# Altium PCB layout.PcbDoc
Units mil, origin at the board's own origin, x right, y up, seen from the top; angles counter-clockwise.
Board outline 6000 x 4000 mil, 4 copper layers (Top Layer, GND, VCC, Bottom Layer), stack 23.756 mil thick; 27 components, 18 nets, 136 pads, 0 vias.
Unrouted connection lines stored in the file: 79.
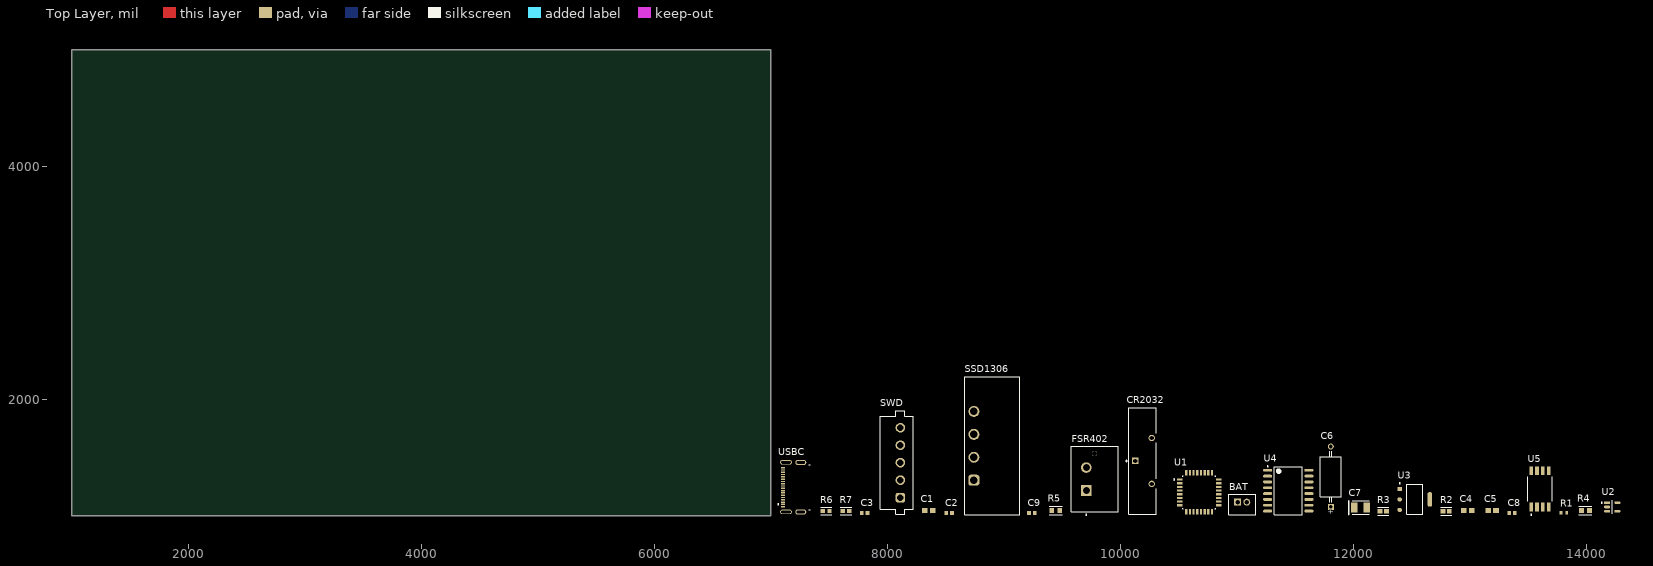
[diagram p0: Top Layer view]
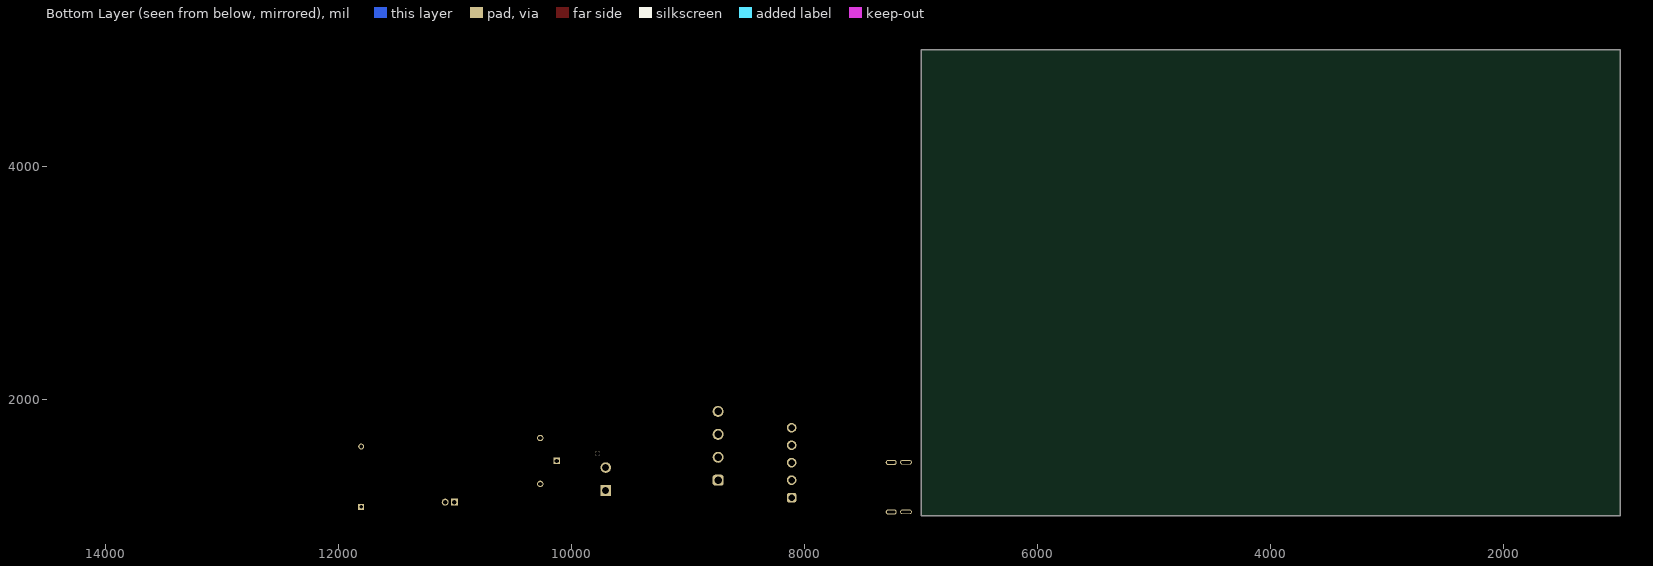
[diagram p1: Bottom Layer view, seen from below]
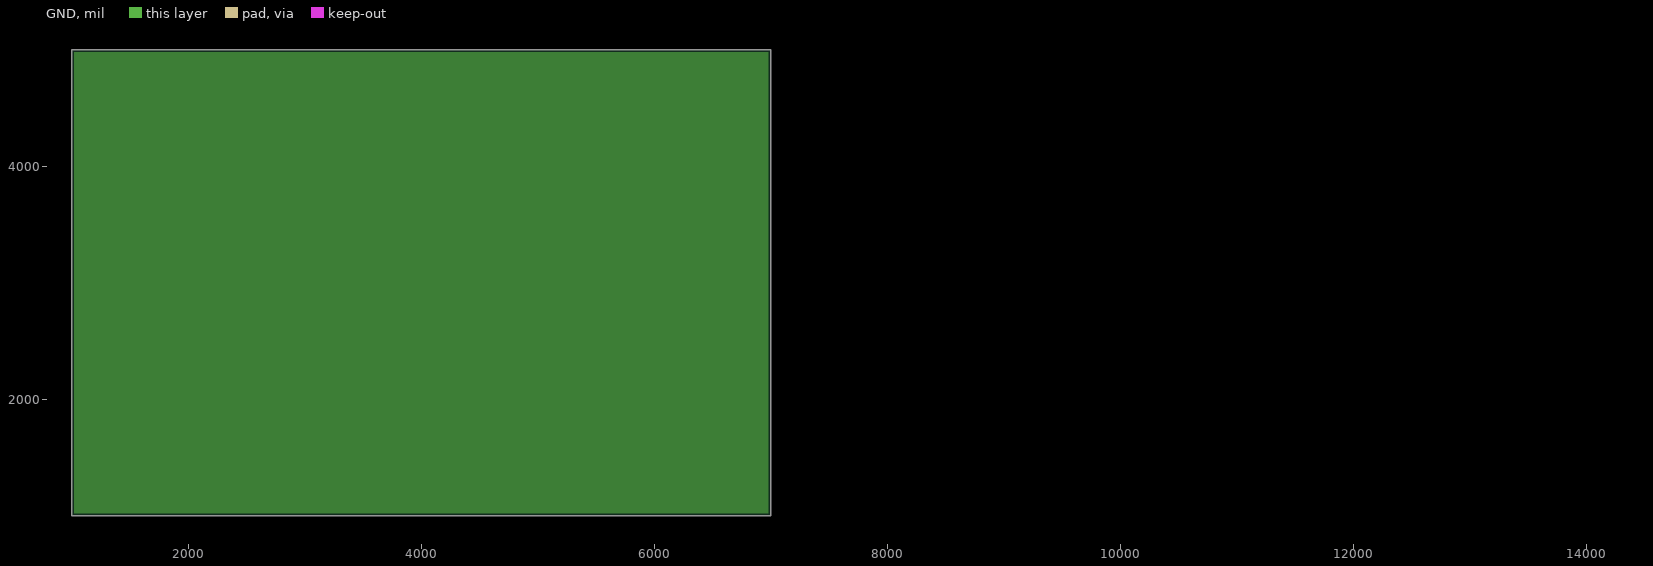
[diagram p2: GND, clearances drawn from the general rule]
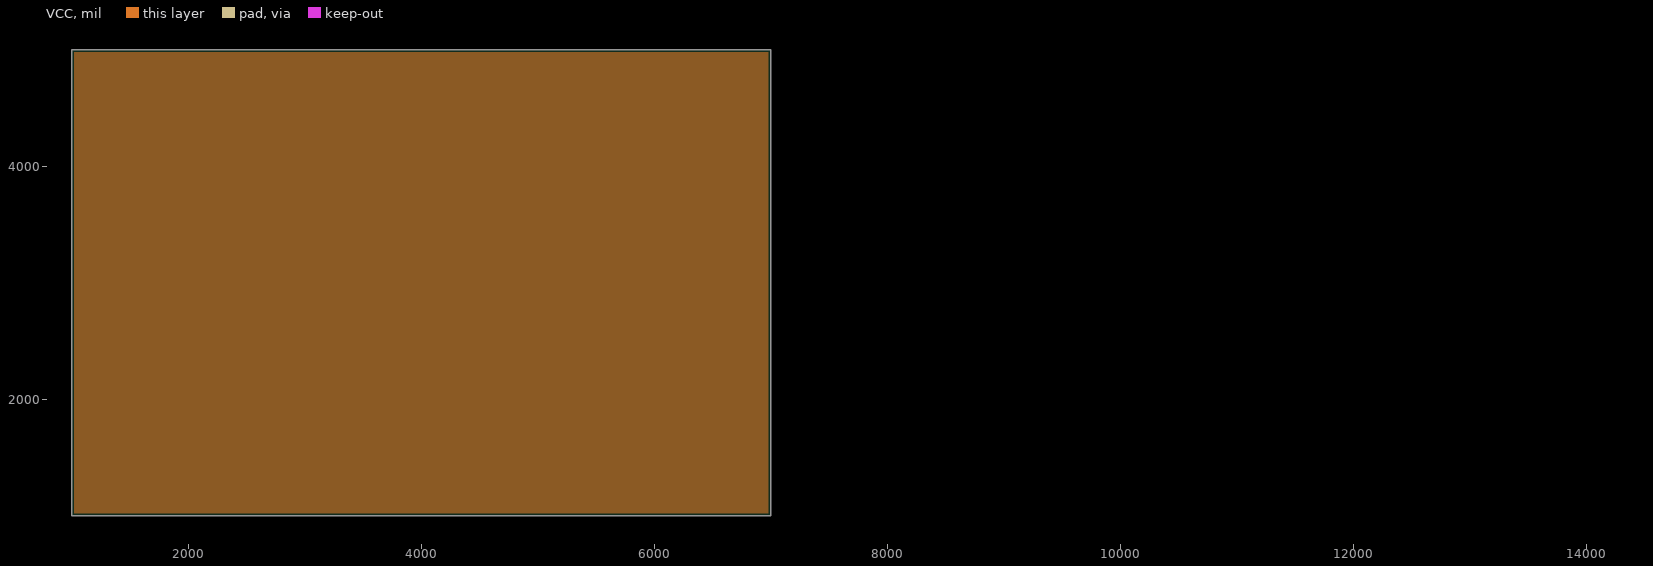
[diagram p3: VCC, clearances drawn from the general rule]

## Layer stack, top to bottom
Top Solder: solder mask 0.4, Solder Resist, Dk 3.5
Top Layer: signal copper 1.4
Dielectric 2: prepreg 2.8, PP-006, Dk 4.1
GND: plane copper 1.378
Dielectric 1: dielectric 12.6, FR-4, Dk 4.8
VCC: plane copper 1.378
Dielectric 3: prepreg 2.8, PP-006, Dk 4.1
Bottom Layer: signal copper 1.4
Bottom Solder: solder mask 0.4, Solder Resist, Dk 3.5

## Board outline
1000,1000 7000,1000 7000,5000 1000,5000

## Design rules (kind name [scope] priority, off if disabled: settings)
Clearance [All] p1: gap=10 ignorepadtopadclearanceinfootprint=FALSE
PlaneClearance [All] p1: clearance=20
PlaneConnect [All] p1: planeconnectstyle=Relief reliefexpansion=20 reliefentries=4 reliefconductorwidth=10 reliefairgap=10
PolygonConnect [All] p1: connectstyle=Relief reliefconductorwidth=10 reliefentries=4 polygonreliefangle="90 Angle" airgapwidth=10
RoutingVias [All] p1: holewidth=28 width=50 viastyle="Through Hole" minholewidth=28 minwidth=50 maxholewidth=28 maxwidth=50
SolderMaskExpansion [All] p1: expansion=0 istentingtop=FALSE
SupplyNets "Schematic Supply Nets_1" [InNet('BAT_MINUS')] p1: voltage=0.000
SupplyNets "Schematic Supply Nets" [InNet('VCC')] p2: voltage=0.000
Width [All] p1: maxlimit=10 minlimit=10 preferedwidth=10
28 further rules are at their usual default settings.

## Components (designator, comment, footprint, x,y, rotation, side; value= is the part's Value field where it differs from the comment)
BAT "B2B-PH-K-S(LF)(SN)" JST-B2B-PH-K-S_V 11045,1095 r0 top
C1 "4.7uF" CAPC1608X90X35ML15T15 8355,1045 r0 top
C2 "100nF" CAPC1608X87X35LL15T15 8530,1025 r0 top
C3 "100nF" CAPC1608X87X35LL15T15 7805,1025 r0 top
C4 "4.7uF" CAPC1608X90X35ML15T15 12980,1045 r0 top
C5 "4.7uF" CAPC1608X90X35ML15T15 13190,1045 r0 top
C6 "10uF" KEMT-T322-2_V 11805,1335 r90 top
C7 "22uF" KEMT-T491-B_L 12060,1070 r0 top
C8 "100nF" CAPC1608X87X35LL15T15 13360,1025 r0 top
C9 "100nF" CAPC1608X87X35LL15T15 9240,1025 r0 top
CR2032 "Holder" FP-1775485-1-MFG 10190,1470 r90 top
FSR402 "" FP-B02B-WPJSS-1_LF_SN-MFG 9780,1315 r90 top
R1 "2kΩ" RESC1608X55X25LL10T15 13805,1025 r0 top
R2 "4.7kΩ" FP-RMCF0603-IPC_B 12795,1040 r0 top
R3 "4.7kΩ" FP-RMCF0603-IPC_B 12255,1040 r0 top
R4 "10kΩ" FP-AC0603-IPC_A 13990,1045 r0 top
R5 "10kΩ" FP-AC0603-IPC_A 9445,1045 r0 top
R6 "5.1kΩ" FP-MCR03-IPC_B 7475,1040 r0 top
R7 "5.1kΩ" FP-MCR03-IPC_B 7645,1040 r0 top
SSD1306 "691317710004" 691317710004 8900,1600 r90 top
SWD "691305330005" 691305330005 8080,1455 r90 top
U1 "STM32G031K8T6" FP-LQFP32-5V-MFG 10675,1200 r0 top
U2 "MCP73831T-2ACI/OT" FP-C04-091-OT-IPC_B 14220,1075 r0 top
U3 "AMS1117-3.3" FP-AMS1117-IPC_C 12525,1140 r0 top
U4 "DS3231SN#" W16#H2_L 11440,1215 r0 top
U5 "W25Q32FVSSIG" FP-SS-MFG 13600,1230 r90 top
USBC "CX90M-16P" FP-CX90M-16P-MFG 7225,1245 r90 top

## Footprints (in the part's own frame and the unit in brackets; to place one, negate y for a bottom-side part, rotate by r counter-clockwise, add the part's x,y. Pads: shape width x height; smd on the part's side, far side on the other; paste and mask are expansions set on the pad)
691305330005 [mm] "Vertical PCB Header with Plastic Latch, pitch 3.81mm, 05p"
  rrect50% 2.1x2.1 hole 1.4: 1(-7.62,-0.8)
  round 2.1 hole 1.4: 2(-3.81,-0.8) 3(0,-0.8) 4(3.81,-0.8) 5(7.62,-0.8)
  silkscreen extent -11.27,-3.6 11.27,3.6, body extent -11.27,-3.6 11.27,3.6, height 9.25
691317710004 [mm] "5.00mm - Closed Horizhontal PCB Header with Flanges - 04p"
  rrect50% 2.4x2.4 hole 1.6: 1(-7.5,4)
  round 2.4 hole 1.6: 2(-2.5,4) 3(2.5,4) 4(7.5,4)
  silkscreen extent -15,-6 15,6, body extent -15,-6 15,6, height 8.55
CAPC1608X87X35LL15T15 [mm] "Chip Capacitor, 2-Leads, Body 1.60x0.80mm, IPC High Density"
  rect 0.8x0.9 smd: 1(-0.625,0) 2(0.625,0)
  body extent -0.87,-0.48 0.87,0.48, height 0.87
CAPC1608X90X35ML15T15 [mm] "Chip Capacitor, 2-Leads, Body 1.60x0.81mm, IPC Low Density"
  rect 1.25x1.1 smd: 1(-0.85,0) 2(0.85,0)
  body extent -0.88,-0.48 0.87,0.48, height 0.9
FP-1775485-1-MFG [mm]
  rect 1.4x1.4 hole 0.9 paste-2539.97 mask+0: 1(0,1.6)
  round 1.4 hole 0.9 paste-2539.97 mask+0: 2(-5,-2) 2(5,-2)
  silkscreen extent -11.63,-3.03 11.63,3.62, body extent -11.73,-3.13 11.73,3.13, height 0.25
FP-AC0603-IPC_A [mil]
  rect 41.68x39.85 smd paste+0 mask+0: 1(-34.52,0) 2(34.52,0)
  silkscreen extent -55,-36 55,36, body extent -75,-40 75,40, height 10
FP-AMS1117-IPC_C [mm]
  rect 1.004x0.872 smd paste+0 mask+0: 1(-3.295,2.29)
  rrect100% 1.004x0.872 smd paste+0 mask+0: 2(-3.295,0) 3(-3.295,-2.29)
  rrect87% 1.004x3.182 smd paste+0 mask+0: 4(3.295,0)
  silkscreen extent -3.42,-3.25 1.75,3.62, body extent -3.9,-3.35 3.9,3.35, height 0.25
FP-B02B-WPJSS-1_LF_SN-MFG [mm]
  rect 2.3x2.3 hole 1.5 paste-2539.97 mask+0: 1(-2.5,1.85)
  round 2.3 hole 1.5 paste-2539.97 mask+0: 2(2.5,1.85)
  round 1.1 hole 1.1 unplated paste-2539.97 mask+0: ""(5.575,0.05)
  silkscreen extent -7.87,-5.1 7.1,5.1, body extent -7.2,-5.2 7.2,5.2, height 0.25
FP-C04-091-OT-IPC_B [mm]
  rect 1.338x0.578 smd paste+0 mask+0: 1(-1.116,0.95)
  rrect100% 1.338x0.578 smd paste+0 mask+0: 2(-1.116,0) 3(-1.116,-0.95) 4(1.116,-0.95) 5(1.116,0.95)
  silkscreen extent -2.41,-1.45 0.05,1.45
FP-CX90M-16P-MFG [mm]
  rect 0.3x0.9 smd paste+0 mask+0: 1(-4.25,3.025) 2(4.25,3.025) A1(-3.75,3.025) A4(-2.75,3.025) A5(-1.75,3.025) A6(-0.75,3.025) A7(0.75,3.025) A8(1.75,3.025) A9(2.75,3.025) A12(3.75,3.025) B1(3.25,3.025) B4(2.25,3.025) B5(1.25,3.025) B6(0.25,3.025) B7(-0.25,3.025) B8(-1.25,3.025) B9(-2.25,3.025) B12(-3.25,3.025)
  rrect100% 1x2.55 hole 2.05 slot 0.5 at 0 deg paste-2539.97 mask+0: 3(-5.4,2.405) 4(5.4,2.405)
  rrect100% 1.1x2.4 hole 1.8 slot 0.5 at 0 deg paste-2539.97 mask+0: 5(-5.4,-0.825) 6(5.4,-0.825)
  silkscreen extent -4.87,-2.9 4.87,4.2, body extent -6.05,-3.37 6.05,3.78, height 0.25
FP-LQFP32-5V-MFG [mm]
  rect 1.2x0.5 smd paste+0 mask+0: 1(-4.25,2.8) 2(-4.25,2) 3(-4.25,1.2) 4(-4.25,0.4) 5(-4.25,-0.4) 6(-4.25,-1.2) 7(-4.25,-2) 8(-4.25,-2.8) 17(4.25,-2.8) 18(4.25,-2) 19(4.25,-1.2) 20(4.25,-0.4) 21(4.25,0.4) 22(4.25,1.2) 23(4.25,2) 24(4.25,2.8)
  rect 0.5x1.2 smd paste+0 mask+0: 9(-2.8,-4.25) 10(-2,-4.25) 11(-1.2,-4.25) 12(-0.4,-4.25) 13(0.4,-4.25) 14(1.2,-4.25) 15(2,-4.25) 16(2.8,-4.25) 25(2.8,4.25) 26(2,4.25) 27(1.2,4.25) 28(0.4,4.25) 29(-0.4,4.25) 30(-1.2,4.25) 31(-2,4.25) 32(-2.8,4.25)
  silkscreen extent -5.57,-3.6 3.6,3.6, body extent -4.95,-4.95 4.95,4.95, height 0.25
FP-MCR03-IPC_B [mil]
  rect 37.72x35.91 smd paste+0 mask+0: 1(-28.62,0) 2(28.62,0)
  silkscreen extent -47,-34 47,34, body extent -57,-28 57,28, height 10
FP-RMCF0603-IPC_B [mil]
  rect 39.61x37.73 smd paste+0 mask+0: 1(-27.6,0) 2(27.6,0)
  silkscreen extent -47,-35 47,35, body extent -57,-29 57,29, height 10
FP-SS-MFG [mm]
  rect 1.9x0.8 smd paste-1000 mask+0: 1(-3.95,1.905) 2(-3.95,0.635) 3(-3.95,-0.635) 4(-3.95,-1.905) 5(3.95,-1.905) 6(3.95,-0.635) 7(3.95,0.635) 8(3.95,1.905)
  silkscreen extent -5.71,-2.69 2.69,2.69, body extent -5,-2.79 5,2.79, height 0.25
JST-B2B-PH-K-S_V [mm] "Connector, 2-Leads, Body 5.9x4.5mm, Pitch 2mm"
  rect 1.5x1.5 hole 1: 1(-1,0.55)
  round 1.5 hole 1: 2(1,0.55)
  silkscreen extent -2.95,-2.25 2.95,2.25, body extent -2.95,-2.25 2.95,2.25, height 6
KEMT-T322-2_V [mm] "THD, 2-Leads, Dia 4.57mm"
  rect 1.3x1.3 hole 0.8 paste-2539.97: 1(-6.57,0)
  round 1.3 hole 0.8 paste-2539.97: 2(6.57,0)
  silkscreen extent -5.52,-2.28 5.55,2.28, body extent -6.82,-2.29 6.83,2.28, height 4.57
KEMT-T491-B_L [mm] "Molded Capacitor, 2-Leads, Body 3.70x3.00mm, IPC High Density"
  rect 1.4x2.15 smd: 1(-1.375,0) 2(1.375,0)
  silkscreen extent -2.57,-1.5 1.85,1.5, body extent -2.07,-1.5 2.07,1.5, height 2.1
RESC1608X55X25LL10T15 [mm] "Chip Resistor, 2-Leads, Body 1.60x0.80mm, IPC High Density"
  rect 0.6x0.8 smd: 1(-0.65,0) 2(0.65,0)
  body extent -0.85,-0.45 0.85,0.45, height 0.55
W16#H2_L [mm] "SOIC, 16-Leads, Body 10.3x7.5mm, Pitch 1.27mm, IPC High Density"
  oval 2x0.6 smd: 1(-4.5,4.445) 2(-4.5,3.175) 3(-4.5,1.905) 4(-4.5,0.635) 5(-4.5,-0.635) 6(-4.5,-1.905) 7(-4.5,-3.175) 8(-4.5,-4.445) 9(4.5,-4.445) 10(4.5,-3.175) 11(4.5,-1.905) 12(4.5,-0.635) 13(4.5,0.635) 14(4.5,1.905) 15(4.5,3.175) 16(4.5,4.445)
  silkscreen extent -4.62,-5.25 3.1,5.42, body extent -3.8,-5.25 3.8,5.25, height 2.65

## Part data
BAT: library part CMP-2000-05162-1, "Male Header, Pitch 2 mm, 1 x 2 Position, Height 6 mm, Tail Length 3.4 mm, -25 to 85 degC, RoHS, Bulk", Manufacturer=JST, Datasheet URL=http://datasheet.octopart.com/B2B-PH-K-S%28LF%29%28SN%29-JST-datasheet-8324864.pdf, Datasheet Version=Nov-08, Manufacturer URL=http://www.jst.com/home2.html, No of Positions=2, Pitch=2mm, Style/Orientation=StraightHeader/Plug, Termination=Crimp, Type=ShroudedHeader
C1 C4 C5: library part CMP-2006-02288-1, "C0603C475K9PAC7411", Manufacturer=Kemet, Part Number=C0603C475K9PAC7411
C2 C3 C8 C9: library part CMP-2006-03843-1, "C0603T104K3RACTU", Manufacturer=Kemet, Part Number=C0603T104K3RACTU
C6: library part CMP-2000-05177-1, "T322C106K025AT", Capacitance=10μF, Manufacturer=Kemet, Tolerance=-10,+10%, Voltage, Rating=25VDC, Brand/Series=T322Series, Configuration=Axial, Datasheet URL=http://download.siliconexpert.com/pdfs/2005/12/01/pemco_a/4/kmt/capacitors/f3100etamoldaxrad.pdf, Datasheet Version=Oct-05, Manufacturer URL=http://www.kemet.com/, Material, Element=Tantalum, Mounting Type=PCB, Termination=Through-hole
C7: library part CMP-2000-07193-1, "T491B226K010AT", Capacitance=22000000pF, Case Code=B, Case Style=Molded, Manufacturer=Kemet, Operating Temp Range=-55Cto125C, Package / Case=3528-21, Package Description="2-Pin Surface Mount Device, Body 3.5 x 2.8 mm", Package Reference=T491-B, Tolerance (+ or -)=10%, Voltage=10VDC, Construction=SMTChip, Datasheet URL=http://capacitoredge.kemet.com/capedge2/DataSheet/Datasheet-T491B226K010AT.pdf?pn=T491B226K010AT, Datasheet Version=10/2016, DCL=2.2uA, DF=6%, ESR=2.4ohm, Failure Rate=NotRequired, Insulation=NotRequired, Lead Spacing (nom)=NotRequiredmm, Length W/Weld=NotRequiredmm, Length W/Weld (max)=NotRequiredmm, Manufacturer URL=http://www.kemet.com/, Mounting Style=SurfaceMount, Mounting Technology=SurfaceMount, Packaging=TapeandReel, Polarity=Polar, Product Depth (mm)=2.8mm, Product Diameter (mm)=NotRequiredmm, Product Height (mm)=1.9mm, Product Length (mm)=3.5mm, Rad Hardened=No, Seal=NotRequired, Seated Plane Height=NotRequiredmm, Wire Form=NotRequired
CR2032: library part CMP-03355-000025-1, "BATT HLDR COIN 20MM 1 CEL PC PIN", Color=Black, Package Quantity=80, Contact Material="Stainless Steel", ELV=Compliant, Housing Color=Black, Housing Material=Nylon, Material=Nylon, Mount="Through Hole", Number of Contacts=2, Number of Ports=1, Number of Positions=2, Number of Terminals/Pins=2, Orientation=Straight, Packaging=Tray, Radiation Hardening=No, RoHS Compliant=Yes, Termination=Solder
FSR402: library part CMP-17439-000657-1, "CONN HEADER VERT 2POS 5MM", Color=Natural, Current Rating=7A, Flammability Rating="UL94 V-0", Max Operating Temperature=85°C, Min Operating Temperature=-25°C, Ratings=Waterproof, Voltage Rating=300V, Connector Type=Header, Contact Finish - Mating=TIN, Contact Material="Copper Alloy", Contact Plating=Tin, Contact Shape=Square, Contact Type="Male Pin", Fastening Type=Latch, Gender=Male, Housing Material=PBT, Insulation Color=Natural, Insulation Material=PBT, Lead Free="Lead Free", Lead Pitch=5mm, Mated Stacking Heights=25.3mm, Mount="Through Hole", Number of Contacts=2, Number of Positions=2, Number of Rows=1, Orientation=Straight, Packaging=Bulk, Pitch=5mm, Reach SVHC Compliant=Yes, Series=WPJ, Termination=Solder, Voltage Rating (AC)=300V, Wire/Cable Gauge=18AWG
R1: library part CMP-2000-04183-1, "RC0603FR-102KL", Manufacturer=Yageo, Part Number=RC0603FR-102KL
R2 R3: library part CMP-26527-004068-1, "RMCF0603FG4K70", Case/Package=0603, Max Operating Temperature=155°C, Max Power Dissipation=100mW, Min Operating Temperature=-55°C, Resistance=4.7kR, Resistor Type="Thick Film", Temperature Coefficient=100ppm/°C, Tolerance=1%, Features="Automotive AEC-Q200", Height=0.022inch, Length=0.061inch, Mount="Surface Mount", Number of Terminations=2, Packaging="Tape and Reel", RoHS Compliant=Yes, Series=RMCF, Width=0.031inch
R4 R5: library part CMP-03412-040683-1, "RES 10kΩ 5.00% 0.2W 0603"
R6 R7: library part CMP-08839-027005-1, "MCR03EZPJ512", Case Code (Imperial)=0603, Case Code (Metric)=1608, Max Operating Temperature=155°C, Max Power Dissipation=100mW, Min Operating Temperature=-55°C, Package Quantity=5000, Resistance=5.1kR, Resistor Type="Thick Film", Temperature Coefficient=200ppm/°C, Tolerance=5%, Voltage Rating (DC)=50V, Case/Package=0603, Contact Plating=Tin, Features="Automotive AEC-Q200", Height=0.022inch, Lead Free="Lead Free", Length=0.063inch, Mount="Surface Mount", Number of Terminations=2, Packaging="Tape and Reel", Power Rating=100mW, RoHS Compliant=Yes, Series=MCR, Technology="THICK FILM", Width=0.031inch, Working Voltage=50V
SSD1306: library part CMP-1502-02058-3, "Terminal Block, 5.00MM Pitch, Close Horizontal Pcb Header, Flanges, 4 Pins"
SWD: library part CMP-1502-01818-3, "Terminal Block, Header, 5Pos, Th Rohs Compliant: Yes", Gender=Male, Lead Pitch=3.81mm, Number of Pins=5, Packaging=Box
U1: library part CMP-12105-000118-1, "IC MCU 32BIT 64KB FLASH 32LQFP"
U2: library part CMP-0133-00143-2, "IC CONTROLLR LI-ION 4.2V SOT23-5", Case/Package=SOT-23, Drain to Source Resistance=350mR, Max Charge Current=500mA, Max Input Voltage=6V, Max Operating Temperature=85°C, Max Output Voltage=4.5V, Max Power Dissipation=1.54W, Min Operating Temperature=-40°C, Min Output Voltage=4.168V, Min Supply Voltage=3.75V, Output Voltage=4.2V, Voltage Rating=4.534V, Contact Plating=Tin, Height=0.051inch, Lead Free="Lead Free", Length=0.122inch, Max Supply Voltage=6V, Mount="Surface Mount", Number of Cells=1, Number of Channels=1, Number of Outputs=1, Number of Pins=5, Output Current=500mA, Packaging="Tape and Reel", Radiation Hardening=No, REACH SVHC="No SVHC", Termination=SMD/SMT, Weight=0.00709oz, Width=0.071inch
U3: library part CMP-209535-000001-1, "LDO Voltage Regulators 1A, 3.3V", Dropout Voltage=1.1V, Manufacturer="Advanced Monolithic Systems", Max Junction Temp=+125°C, Max Power Dissipation=1.2W, Max Supply Voltage=15V, Nominal Supply Current=5mA, Output Current=1A, Output Voltage=3.3V, Package=AMS1117, Temperature="-40°C to +125°C", Temperature Range Low=-40°C, Automotive=No, Category=IC, ComponentLink2Description=Datasheet, ComponentLink2URL=http://www.advanced-monolithic.com/pdf/ds1117.pdf, Device Class L1="Integrated Circuits (ICs)", Device Class L2="Power Management ICs", Device Class L3="Voltage Regulators - Linear", Height=1.8mm, Ipc Land Pattern Name=SOT229P700X180-4, Lead Free=Yes, Manufacturer Part Number=AMS1117-3.3, Number of Outputs=1, Octopart=https://octopart.com/ams1117-3.3-advanced+monolithic+systems-25899300, Output Type=Fixed, RoHS=TRUE, Standoff Height=0.64mm, Temperature Range High=+125°C
U4: library part CMP-0254-00293-2, "Extremely Accurate I2C-Integrated Real-Time Clock/TCXO/Crystal, 16-Pin SO, -40 to 85 degC, RoHS Qualified", Code_IPC=SOIC127P1030-16, Code_JEDEC=MS-013-AA, ComponentLink1Description="Manufacturer URL", ComponentLink1URL=http://www.maxim-ic.com, ComponentLink2Description=Datasheet, ComponentLink2URL=http://datasheets.maxim-ic.com/en/ds/DS3231.pdf, ComponentLink3Description="Package Specification", ComponentLink3URL=http://pdfserv.maxim-ic.com/package_dwgs/21-0042.PDF, DatasheetVersion="Rev 8, Jul-2010", PackageDescription="16-Pin Small-Outline IC, Wide (0.3in), 1.27 mm Pitch, SOIC (W), RoHS Qualified", PackageReference=W16#H2, PackageVersion="revD, 2010"
U5: library part CMP-2000-05006-2, "IC FLASH 32M SPI 104MHZ 8SOIC", Ambient Temperature Range High=+85°C, Ambient Temperature Range Low=-40°C, Frequency=104MHz, Manufacturer=Winbond, Max Supply Voltage=3.6V, Min Supply Voltage=2.7V, Nominal Supply Current=8-20mA, Package=SS, Temperature="-40°C to +85°C", Access Time=7ns, Automotive=No, Category=IC, ComponentLink2Description=Datasheet, ComponentLink2URL=https://www.winbond.com/resource-files/w25q32fv%20revj%2006032016.pdf, Device Class L1="Integrated Circuits (ICs)", Device Class L2=Memory, Device Class L3=Flash, Digikey Description="IC FLASH 32M SPI 104MHZ 8SOIC", Footprint Url=http://www.winbond.com/resource-files/an0000009%20spiflash%20pcb%20layout%20guideline%20v2.0%2009252017.pdf?__locale=en, Height=2.16mm, Interface=SPI,Other, Ipc Land Pattern Name=SOIC127P790X195-8, Lead Free=Yes, Manufacturer Part Number=W25Q32FVSSIG, Memory Size=32Mbits, Memory Type=FLASH, Obsolete Part=true, Octopart=https://octopart.com/w25q32fvssig-winbond-23896462, RoHS=TRUE, Standoff Height=0.05mm, Temperature Range High=+85°C, Temperature Range Low=-40°C
USBC: library part CMP-11601-000005-1, "CONN RCPT USB2.0 TYPEC 16POS SMD", Current Rating=1.25A, Flammability Rating="UL94 V-0", Insulation Color=Black, Max Operating Temperature=85°C, Min Operating Temperature=-30°C, Connector Type=USB, Contact Plating=Gold, Gender=Receptacle, Mating Cycles=10000, Mount="Surface Mount", Number of Contacts=16, Number of Ports=1, Packaging="Cut Tape", Shielding=Shielded, Termination=Solder

## Nets (pads, with @x,y where several pads share a name; then routed paths per layer and width w, separated by ;. In a path a pad name is that pad's centre, name@x,y a point inside that pad or via, vN(x,y) a via of type N, cw(c..) or ccw(c..) an arc to the next point about the centre after c; other vN are vias at no path point)
BAT_MINUS: BAT.2 C1.1 C2.1 C3.2 C4.1 C5.1 C6.2 C7.2 C8.1 C9.1 CR2032.1 R1.1 R5.1 R6.2 R7.2 SSD1306.4 SWD.1 U1.5 U2.2 U3.1 U4.13 U5.4 USBC.1 USBC.2 USBC.3 USBC.4 USBC.5 USBC.6 USBC.A1 USBC.A12 USBC.B1 USBC.B12
BAT_PLUS: BAT.1 C4.2 C6.1 U2.3 U3.3
CS: R4.1 U1.1 U5.1
FSR_ADC: C9.2 FSR402.2 R5.2 U1.7
MISO: U1.28 U5.2
MOSI: U1.29 U5.5
NetC3_1: C3.1 SWD.2 U1.6
NetCR2032_2: CR2032.2 U4.14
NetR1_2: R1.2 U2.5
NetR6_1: R6.1 USBC.A5
NetR7_1: R7.1 USBC.B5
SCK: U1.27 U5.6
SCL: R2.1 SSD1306.2 U1.19 U4.16
SDA: R3.1 SSD1306.3 U1.21 U4.15
SWCLK: SWD.3 U1.25
SWDIO: SWD.4 U1.24
VBUS: C5.2 U2.4 USBC.A4 USBC.A9 USBC.B4 USBC.B9
VCC: C1.2 C2.2 C7.1 C8.2 FSR402.1 R2.2 R3.2 R4.2 SSD1306.1 SWD.5 U1.4 U3.2 U3.4 U4.2 U5.3 U5.7 U5.8
pads on no net: FSR402. U1.2 U1.3 U1.8 U1.9 U1.10 U1.11 U1.12 U1.13 U1.14 U1.15 U1.16 U1.17 U1.18 U1.20 U1.22 U1.23 U1.26 U1.30 U1.31 U1.32 U2.1 U4.1 U4.3 U4.4 U4.5 U4.6 U4.7 U4.8 U4.9 U4.10 U4.11 U4.12 USBC.A6 USBC.A7 USBC.A8 USBC.B6 USBC.B7 USBC.B8

## Polygon pours and split planes (outlines as drawn)
no net on GND (split plane): 6979.9,1020.1 1020.1,1020.1 1020.1,4979.9 6979.9,4979.9
no net on VCC (split plane): 6979.9,1020.1 1020.1,1020.1 1020.1,4979.9 6979.9,4979.9

## Text inside footprints (layer, text, board x,y; h text height)
C6: Top Overlay "+" at 11825,1006.81 h39.37 r90